# EAGLE board star (EAGLE 9.6.2), part 1 of 2
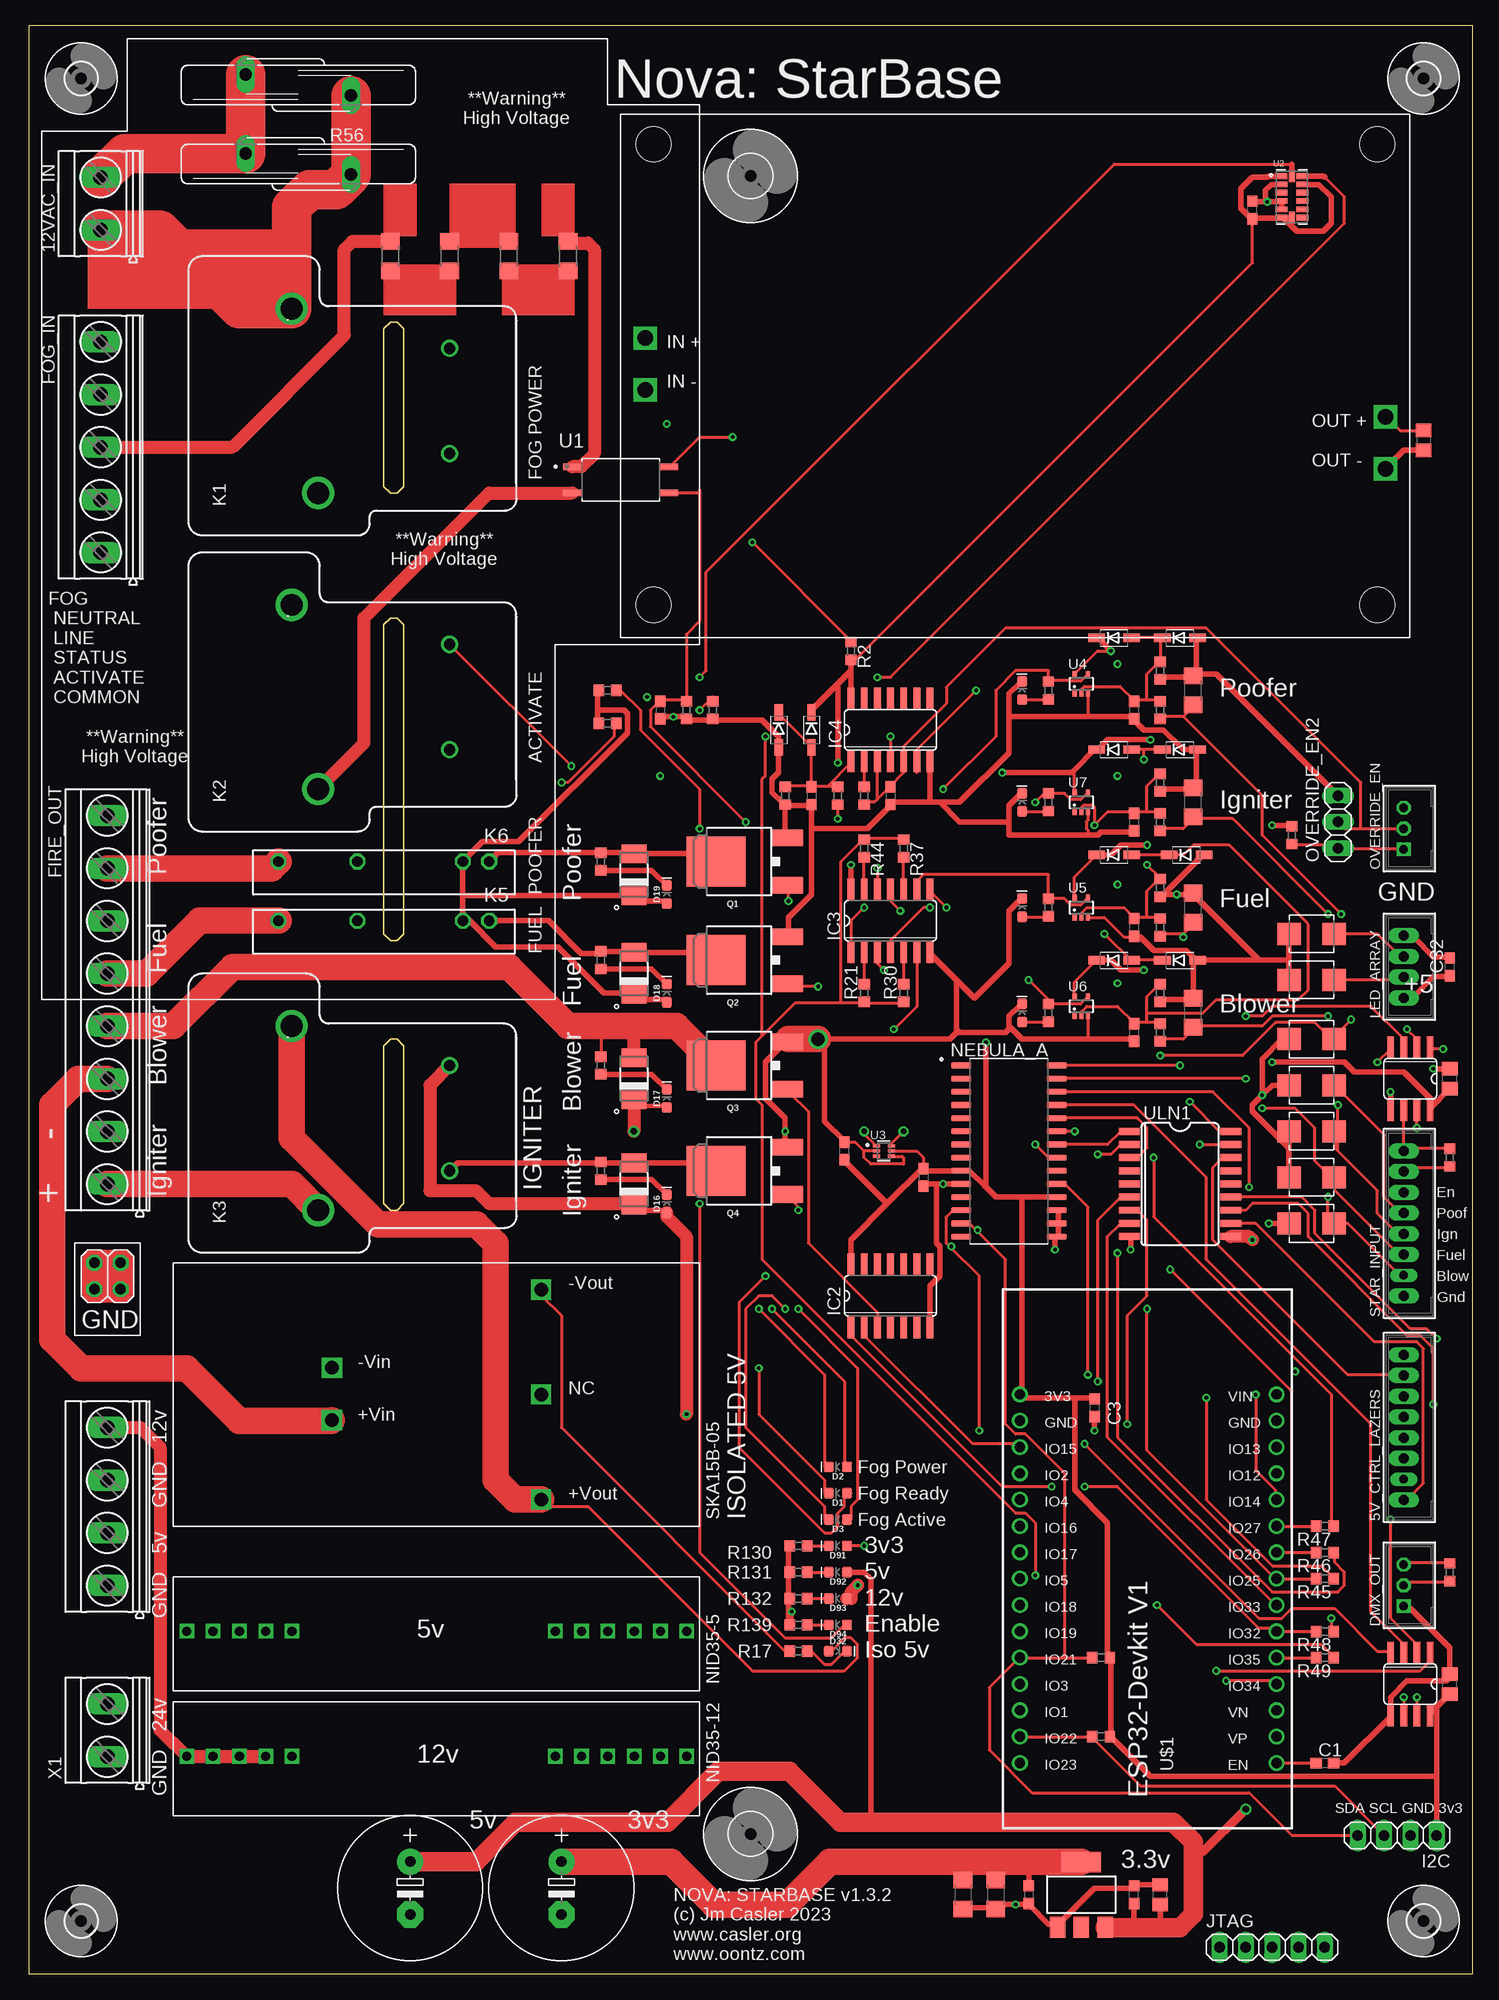
[diagram p0: board, top side]
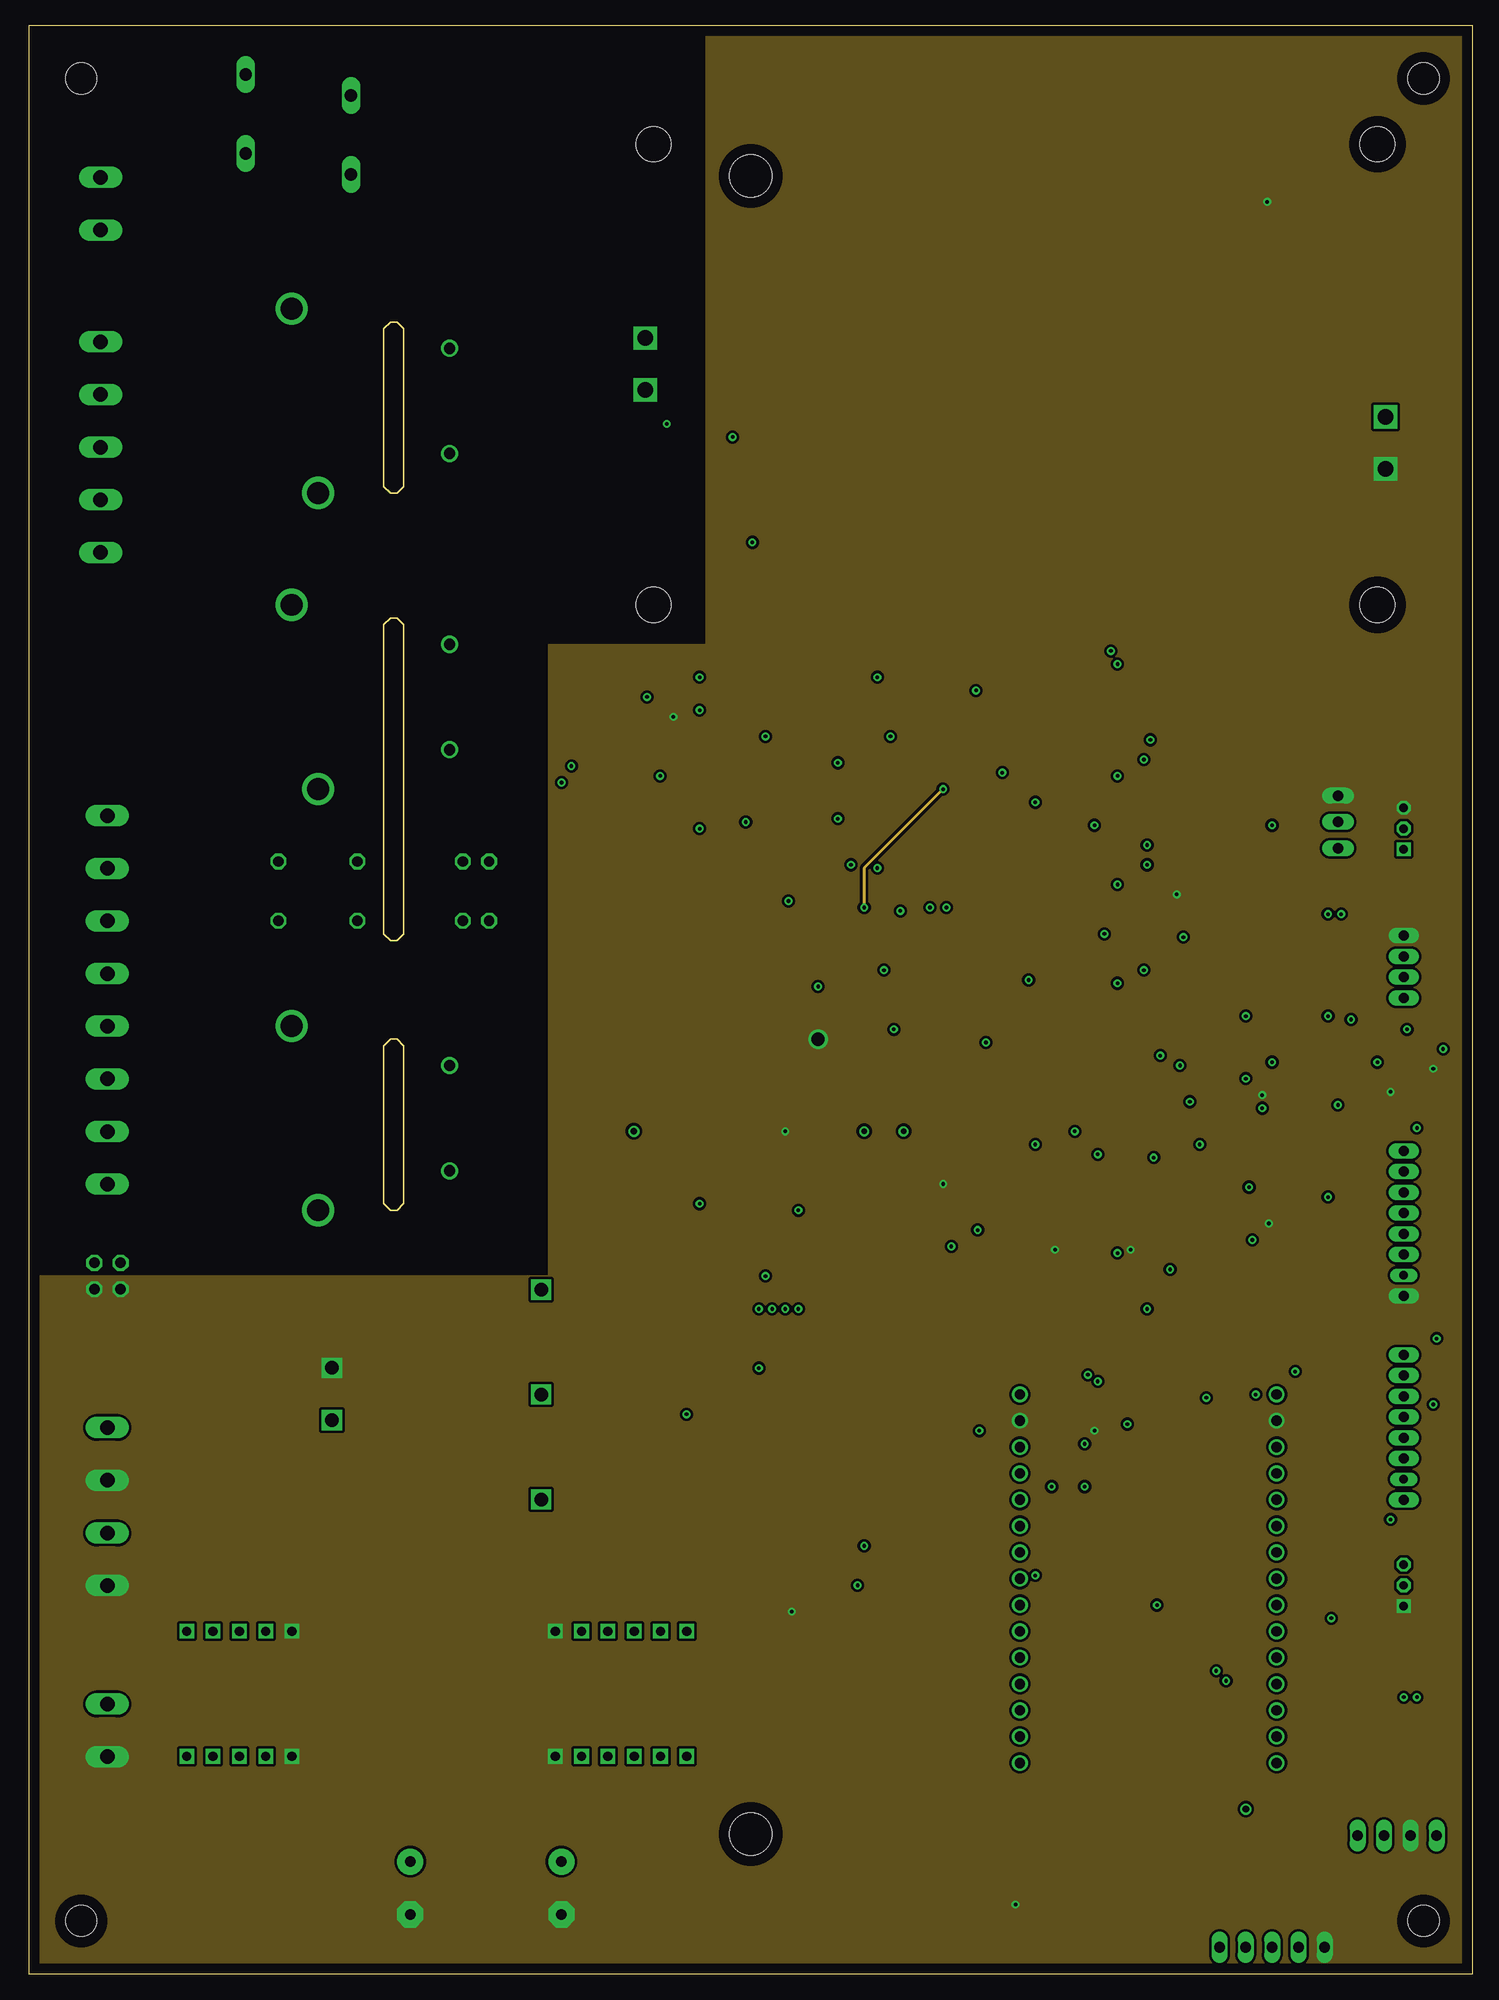
[diagram p1: board, inner layer $GND]
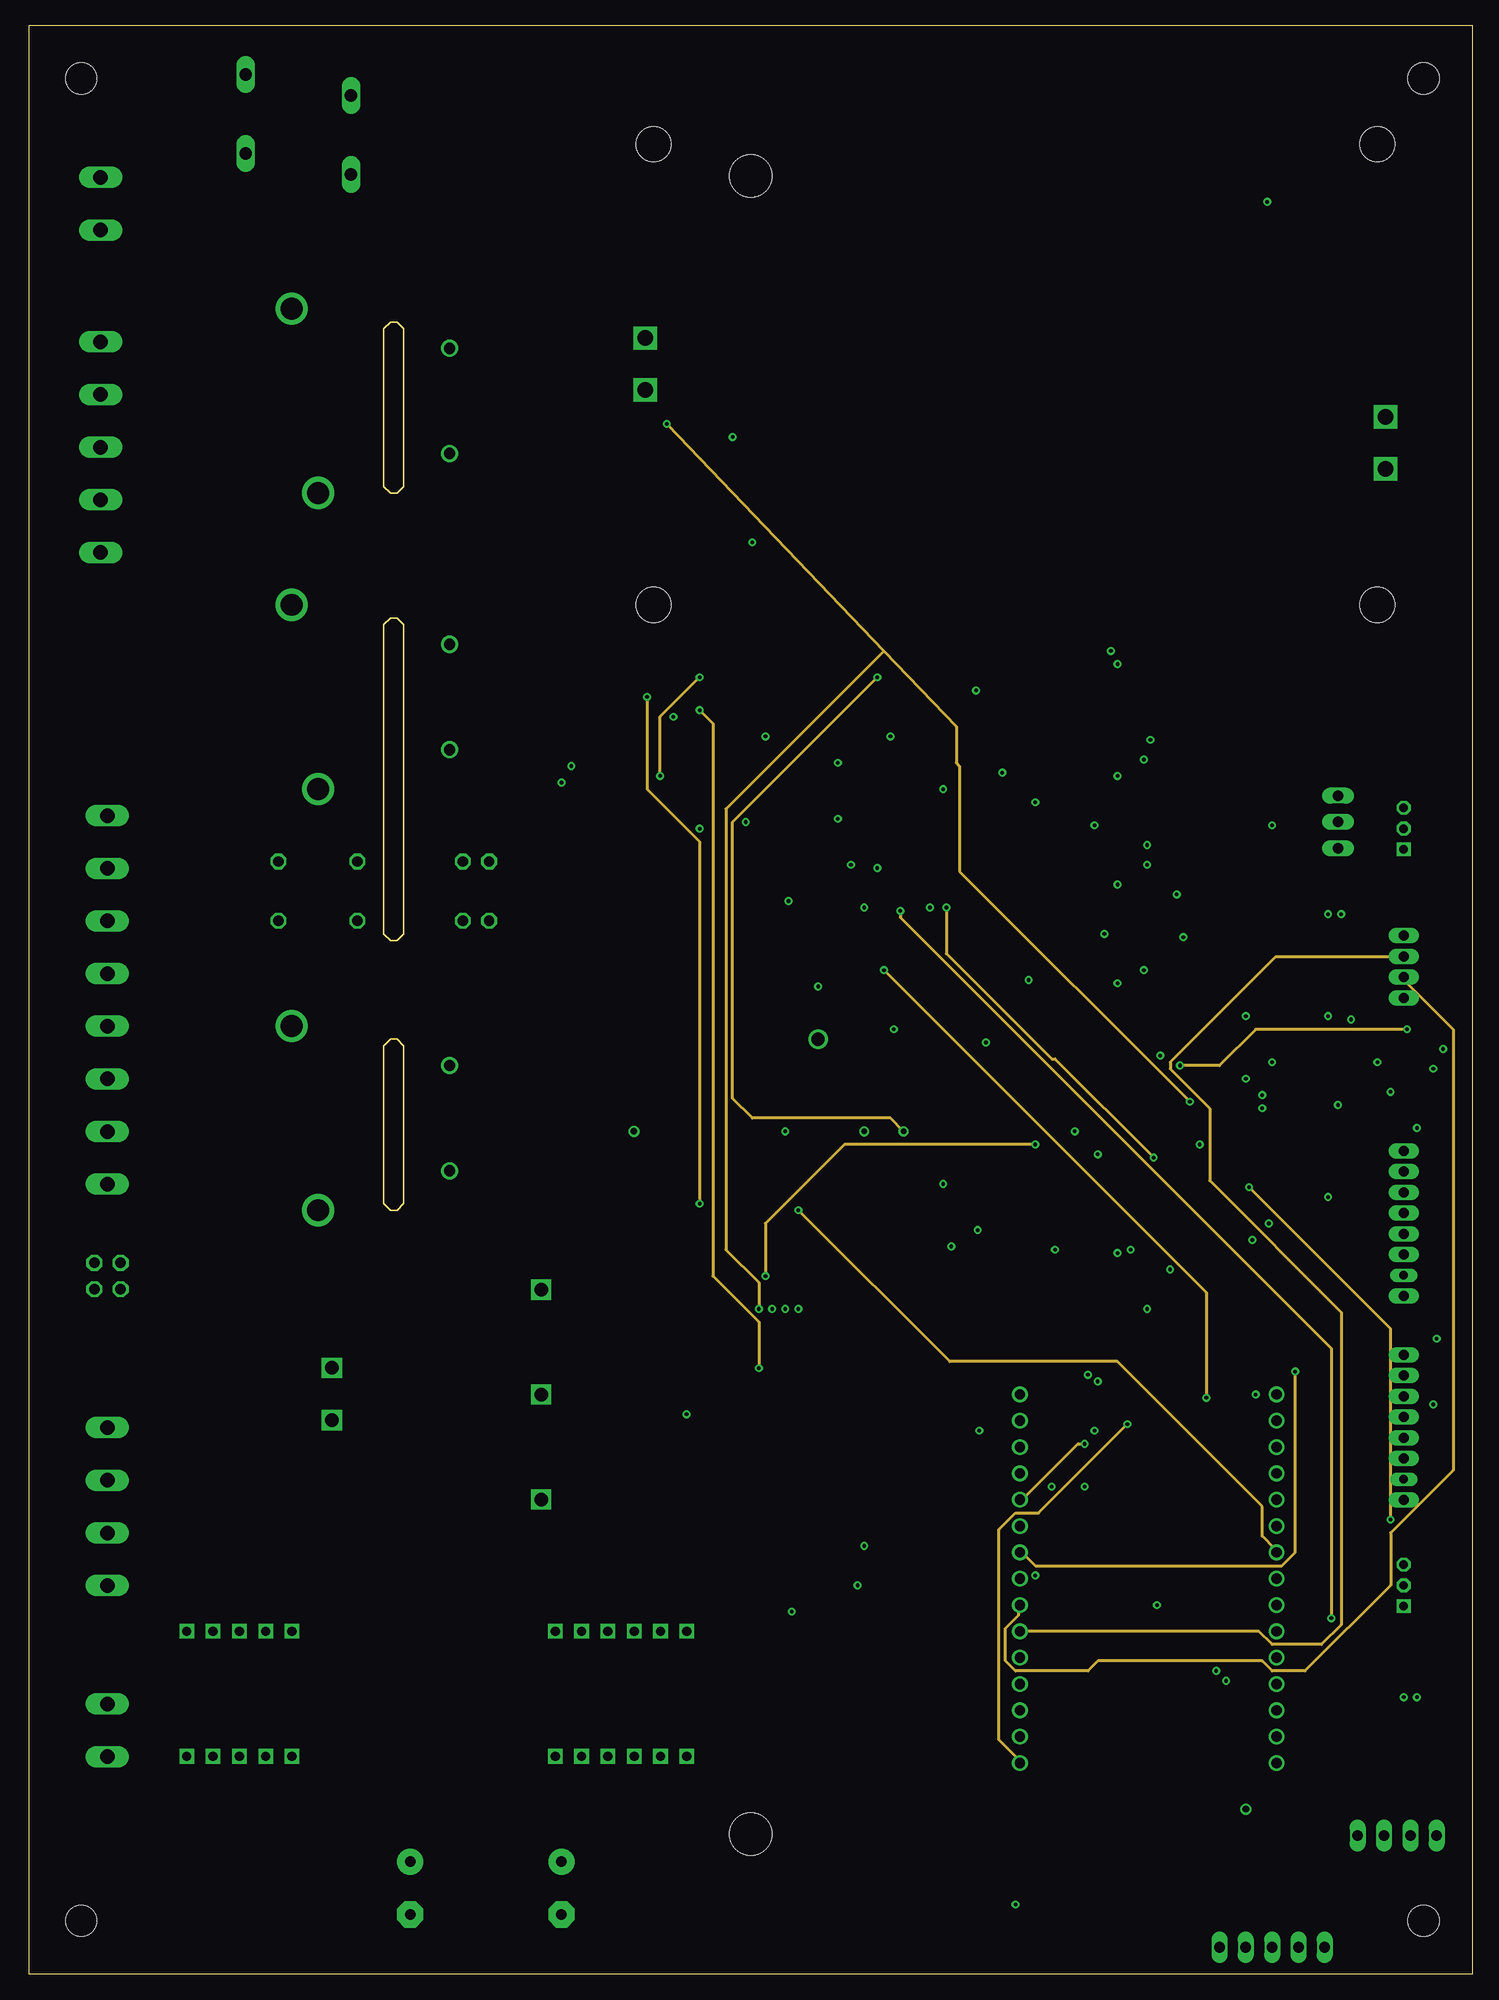
[diagram p2: board, inner layer SIGNAL3]
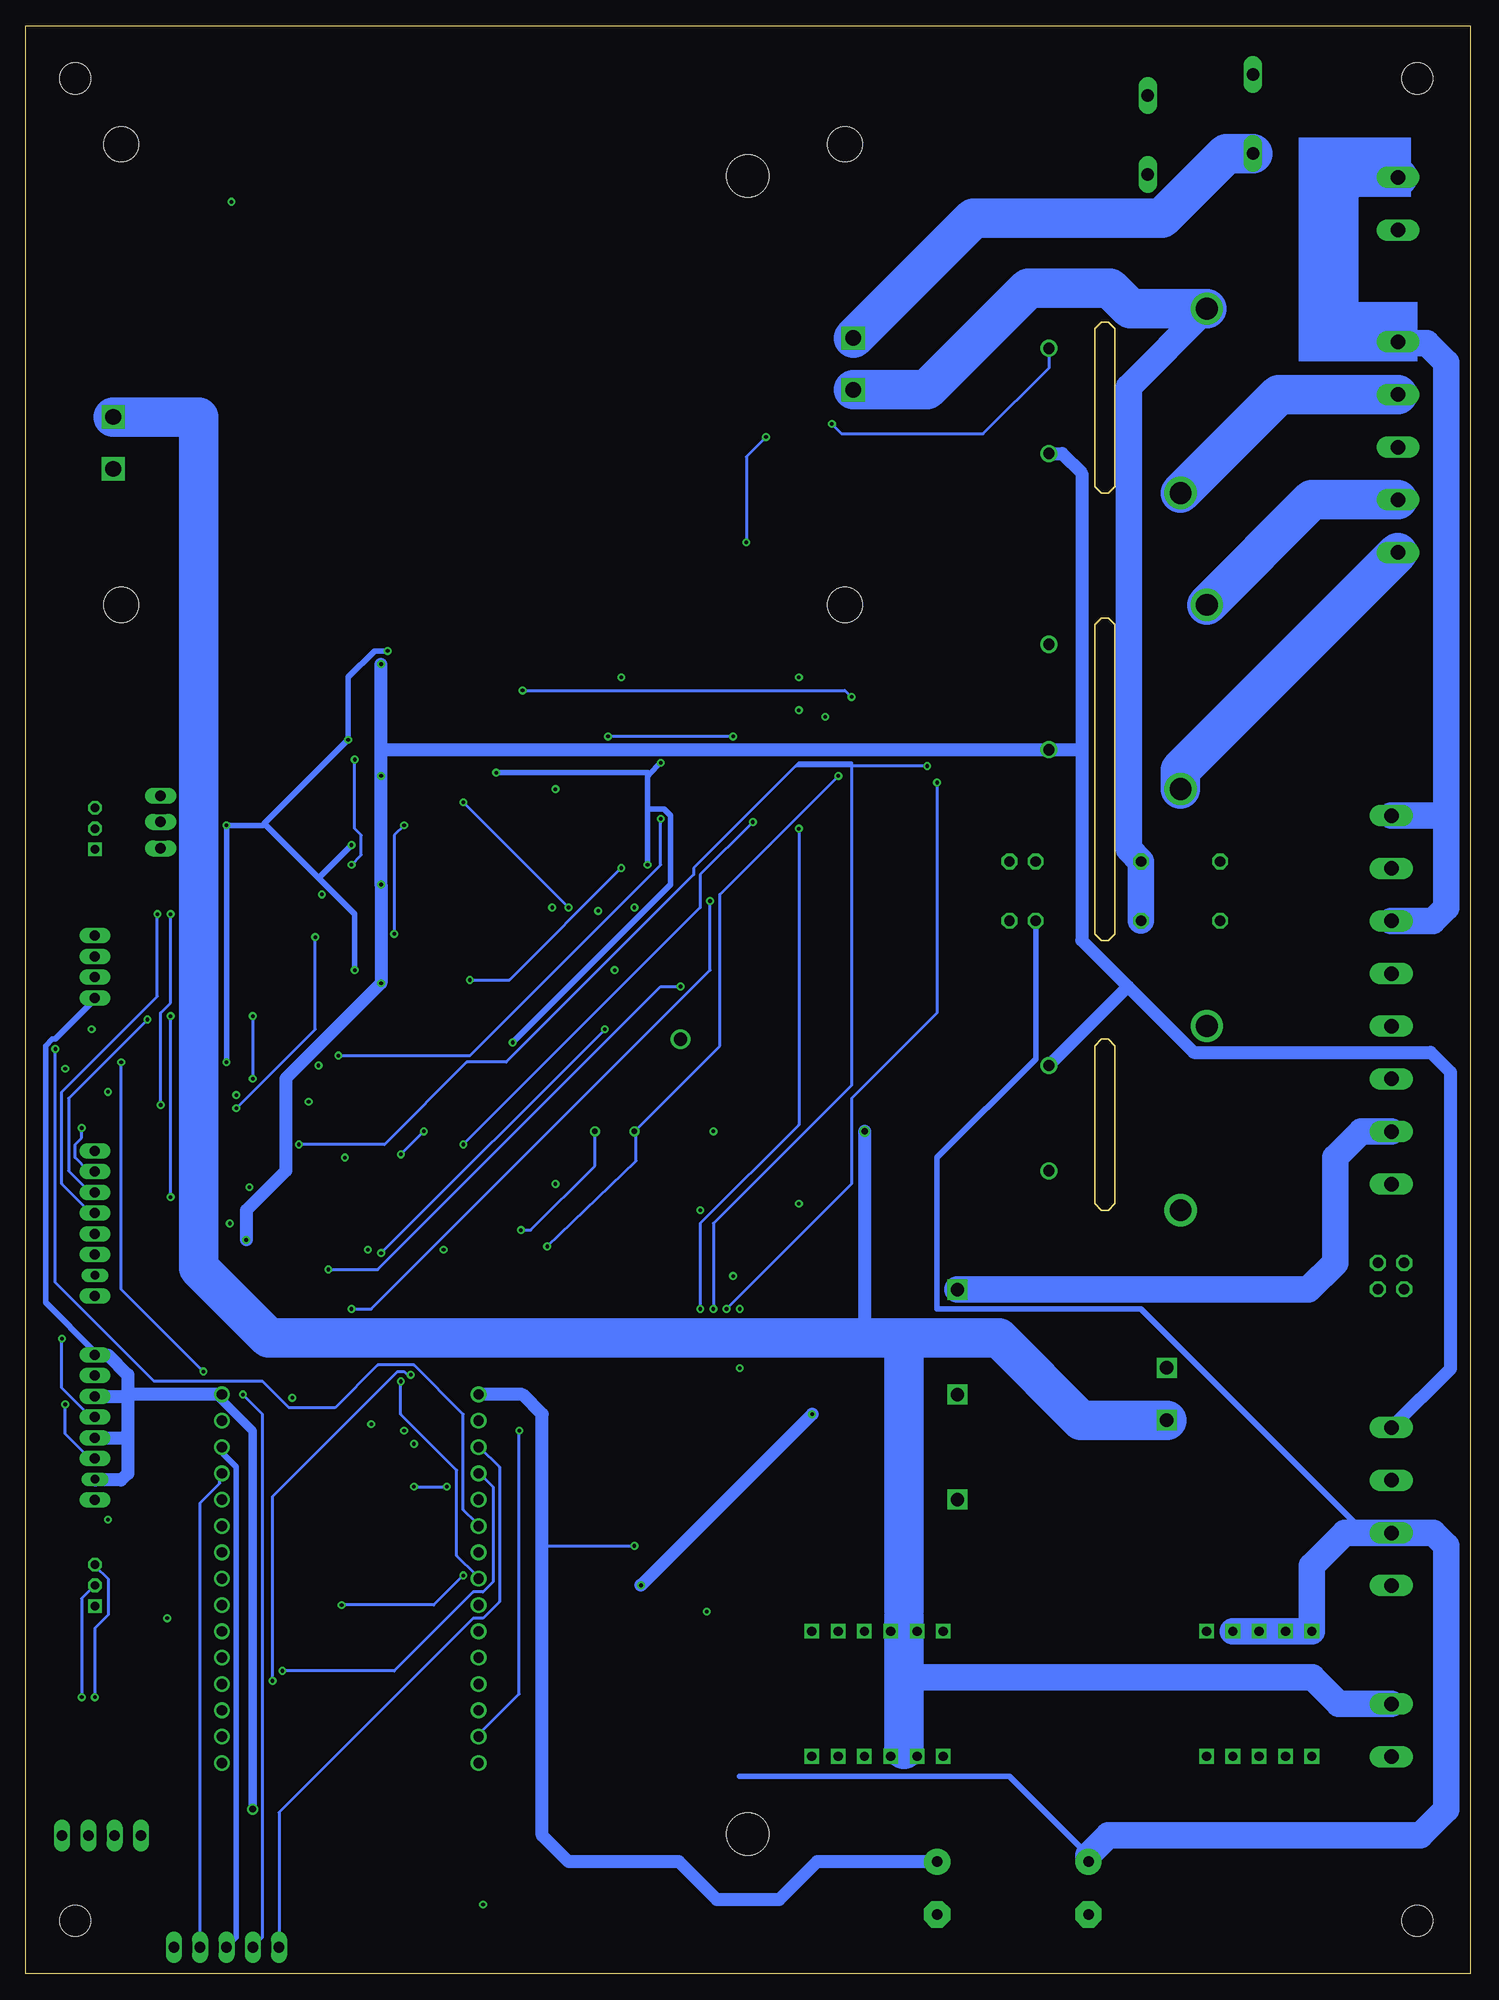
[diagram p3: board, bottom side, seen from below]

Size 139.37 x 187.95 mm. Coordinates in mm from the lower left corner, seen from the top.
Outline: 0,0 139.37,0 139.37,187.95 0,187.95 0,0
Copper layers (1+2*15+16): Top 0.035mm / dielectric 1.5mm / $GND 0.035mm / dielectric 0.15mm / SIGNAL3 0.035mm / dielectric 0.2mm / Bottom 0.035mm
Design rules "default *": minimum track width 6mil, minimum drill 0.35mm, track to track 6mil, track to pad 6mil, pad to pad 6mil, via to via 6mil, smd to smd 5mil, copper to edge 40mil, drill to drill 6mil, minimum pad ring 10mil, minimum via ring 8mil, stop-mask expansion 4mil, vias tented up to drill 20mil, thermal gap 10mil
Net classes: 0 default: width 0.305 mm, clearance 0.203 mm; 1 GND: width 0.305 mm, clearance 0.254 mm; 2 12V: width 1.27 mm, clearance 0.254 mm; 3 5V: width 0.508 mm, clearance 0.254 mm; 4 3V3: width 0.305 mm, clearance 0.254 mm; 5 12V_FUSED: width 0.635 mm, clearance 0.254 mm; 6 120VAC_PWR: width 1.27 mm, clearance 0.508 mm; 7 120VAC: width 1.27 mm, clearance 0.508 mm; 8 60V: width 1.27 mm, clearance 0.508 mm
tRestrict: area 34.3,142.9 to 36.2,159.4; area 34.3,99.7 to 36.2,130.8; area 34.3,73.7 to 36.2,90.2
bRestrict: area 34.3,142.9 to 36.2,159.4; area 34.3,99.7 to 36.2,130.8; area 34.3,73.7 to 36.2,90.2
Milling: 24 lines

## Footprints (pad centres in the part's own frame; a part is rotated, then mirrored left to right if it is on the bottom)
B8B-PH-K = drill 0.965 long: 1 -7,0; 3 -3,0; 4 -1,0; 5 1,0; 6 3,0; 7 5,0; 8 7,0 | drill 0.813 long: 2 -5,0
MKDSN1,5/2-5,08 = drill 1.397 pad 2 long: 1 -2.561,0.025; 2 2.519,0.025
C0603 = smd 1.1 x 1: 1 -0.85,0; 2 0.85,0
C0805 = smd 1.3 x 1.5: 1 -0.95,0; 2 0.95,0
C1206 = smd 1.6 x 1.8: 1 -1.4,0; 2 1.4,0
E5-13 = drill 1.016 pad 2.54: + -2.54,0 | drill 1.016 pad 2.54 octagon: - 2.54,0
LED-0603 = smd 1 x 1: A -0.877,0; C 0.877,0
DIOM4336X265N = smd 2.28 x 2.12: 1 -2.165,0; 2 2.165,0
DO-214AC = smd 1.8 x 2.4: A 2.025,0; C -2.025,0
SOD123 = smd 1.6 x 0.8: A 1.7,0; C -1.7,0
B3B-PH-K = drill 0.813 square: 1 -2,0 | drill 0.813 octagon: 2 0,0; 3 2,0
EPS-25 = drill 1.5 square: IN+ 2.365,28.92; IN- 2.365,23.92; OUT+ 73.795,21.3; OUT- 73.795,16.3 | hole 3.4: 3.175,47.625; 73.025,47.625; 73.025,3.175; 3.175,3.175
MKDSN1,5/8-5,08 = drill 1.397 pad 2 long: 1 -17.801,0.025; 2 -12.721,0.025; 3 -7.641,0.025; 4 -2.561,0.025; 5 2.519,0.025; 6 7.599,0.025; 7 12.679,0.025; 8 17.759,0.025
MKDSN1,5/5-5,08 = drill 1.397 pad 2 long: 1 -10.181,0.025; 2 -5.101,0.025; 3 -0.021,0.025; 4 5.059,0.025; 5 10.139,0.025
3,0 = hole 3: 0,0
4,1 = hole 4.1: 0,0
1X04 = drill 1.016 long: 1 -3.81,0; 2 -1.27,0; 3 1.27,0; 4 3.81,0
SO08 = smd 0.66 x 2.032: 1 -1.905,-3.073; 2 -0.635,-3.073; 3 0.635,-3.073; 4 1.905,-3.073; 5 1.905,3.073; 6 0.635,3.073; 7 -0.635,3.073; 8 -1.905,3.073
SO14 = smd 0.66 x 2.032: 1 -3.81,-3.073; 2 -2.54,-3.073; 3 -1.27,-3.073; 4 0,-3.073; 5 1.27,-3.073; 6 2.54,-3.073; 7 3.81,-3.073; 8 3.81,3.073; 9 2.54,3.073; 10 1.27,3.073; 11 0,3.073; 12 -1.27,3.073; 13 -2.54,3.073; 14 -3.81,3.073
SOT223 = smd 1.5 x 2: 1 -2.3,-3.15; 2 0,-3.15; 3 2.3,-3.15 | smd 3.8 x 2: 4 0,3.15
2X02 = drill 1.016 octagon: 1 -1.27,-1.27; 2 -1.27,1.27; 3 1.27,-1.27; 4 1.27,1.27
1X05 = drill 1.016 long: 1 -5.08,0; 2 -2.54,0; 3 0,0; 4 2.54,0; 5 5.08,0
JT1A-PCB = drill 1.1: 1 5.08,0; 2 -5.08,0 | drill 2.1: C -8.89,12.7; NO 8.89,15.24
AQG = drill 1 octagon: + -7.62,0; - -10.16,0; O1 2.54,0; O2 10.16,0
B4B-PH-K = drill 0.965 long: 1 -3,0; 2 -1,0; 3 1,0; 4 3,0
SOIC127P1030X265-28N = smd 1.9 x 0.6: 1 -4.605,8.255; 2 -4.605,6.985; 3 -4.605,5.715; 4 -4.605,4.445; 5 -4.605,3.175; 6 -4.605,1.905; 7 -4.605,0.635; 8 -4.605,-0.635; 9 -4.605,-1.905; 10 -4.605,-3.175; 11 -4.605,-4.445; 12 -4.605,-5.715; 13 -4.605,-6.985; 14 -4.605,-8.255; 15 4.605,-8.255; 16 4.605,-6.985; 17 4.605,-5.715; 18 4.605,-4.445; 19 4.605,-3.175; 20 4.605,-1.905; 21 4.605,-0.635; 22 4.605,0.635; 23 4.605,1.905; 24 4.605,3.175; 25 4.605,4.445; 26 4.605,5.715; 27 4.605,6.985; 28 4.605,8.255
NID35 = drill 0.9 square: COM1 11.46,5.73; COM2 36.86,5.73; NC 44.48,5.73; RC 49.56,5.73; TRIM 47.02,5.73; VIN1 39.4,5.73; VIN2 41.94,5.73; VOUT1 1.3,5.73; VOUT2 3.84,5.73; VOUT3 6.38,5.73; VOUT4 8.92,5.73
1X03 = drill 1.016 long: 1 -2.54,0; 2 0,0; 3 2.54,0
MKDSN1,5/4-5,08 = drill 1.397 pad 2 long: 1 -7.641,0.025; 2 -2.561,0.025; 3 2.519,0.025; 4 7.599,0.025
DPAK = smd 1.6 x 3: 1 -2.28,-5.31; 3 2.28,-5.31 | smd 4.826 x 5.715: 4 0,1.588
R0603 = smd 1 x 1.1: 1 -0.85,0; 2 0.85,0
R1206 = smd 1.6 x 1.803: 1 -1.422,0; 2 1.422,0
S20K20 = drill 1.194 long: 1 -1.016,-5.08; 2 1.016,5.08
SKA15B = drill 1.3 square: +VIN 15.3,10.22; +VOUT 35.5,2.58; -VIN 15.3,15.28; -VOUT 35.5,22.82; NC 35.5,12.7
SOP254P1015X230-4N = smd 1.84 x 0.64: 1 -4.685,1.27; 2 -4.685,-1.27; 3 4.685,-1.27; 4 4.685,1.27
PQFN80P300X500X100-14N = smd 1.145 x 0.55: 1 -1.01,2; 2 -1.01,1.2; 3 -1.01,0.4; 4 -1.01,-0.4; 5 -1.01,-1.2; 6 -1.01,-2; 8 1.01,-2; 9 1.01,-1.2; 10 1.01,-0.4; 11 1.01,0.4; 12 1.01,1.2; 13 1.01,2 | smd 0.55 x 1.145: 7 0,-2.01; 14 0,2.01
SOT50P160X60-6N = smd 0.67 x 0.3: 1 -0.735,0.5; 2 -0.735,0; 3 -0.735,-0.5; 4 0.735,-0.5; 5 0.735,0; 6 0.735,0.5
SC70-5 = smd 0.4 x 0.6: 1 -0.65,-0.95; 2 0,-0.95; 3 0.65,-0.95; 4 0.65,0.95; 5 -0.65,0.95
ESP32-DEVKITV1 = drill 1 pad 1.422: 1 -22.87,-13.54; 2 -20.33,-13.54; 3 -17.79,-13.54; 4 -15.25,-13.54; 5 -12.71,-13.54; 6 -10.17,-13.54; 7 -7.63,-13.54; 8 -5.09,-13.54; 9 -2.55,-13.54; 10 -0.01,-13.54; 11 2.53,-13.54; 12 5.07,-13.54; 13 7.61,-13.54; 14 10.15,-13.54; 15 12.69,-13.54; 16 12.69,11.23; 17 10.15,11.23; 18 7.61,11.23; 19 5.07,11.23; 20 2.53,11.23; 21 -0.01,11.23; 22 -2.55,11.23; 23 -5.09,11.23; 24 -7.63,11.23; 25 -10.17,11.23; 26 -12.71,11.23; 27 -15.25,11.23; 28 -17.79,11.23; 29 -20.33,11.23; 30 -22.87,11.23
SO18L = smd 0.66 x 2.032: 1 -0.635,-4.902; 2 0.635,-4.902; 3 1.905,-4.902; 4 3.175,-4.902; 5 4.445,-4.902; 6 5.715,-4.902; 7 6.985,-4.902; 8 8.255,-4.902; 9 9.525,-4.902; 10 9.525,4.902; 11 8.255,4.902; 12 6.985,4.902; 13 5.715,4.902; 14 4.445,4.902; 15 3.175,4.902; 16 1.905,4.902; 17 0.635,4.902; 18 -0.635,4.902

## Placement (x,y rotation side)
5V_CTRL_LAZERS  B8B-PH-K  [B8B-PH-K]  132.72,52.7 90 top
12VAC_IN  MKDSN1,5/2-5,08  [MKDSN1,5/2-5,08]  6.99,170.81 90 top
C1  10uf  [C0603]  125.09,20.32 0 top
C2  C_1UF/50V_0603  [C0603]  118.11,170.18 90 top
C3  10uf  [C0603]  102.87,54.61 270 top
C4  C_1UF/50V_0603  [C0603]  78.74,79.38 90 top
C6  1uf  [C0805]  109.22,7.62 90 top
C7  C_1NF/50V_0603  [C0603]  60.96,121.92 270 top
C8  10uf  [C0603]  86.36,76.83 270 top
C11  C_100UF/6.3V_1206  [C1206]  93.34,7.62 270 top
C12  C_100UF/6.3V_1206  [C1206]  90.17,7.62 270 top
C13  C_1NF/2KV_1206  [C1206]  112.39,123.83 90 top
C14  1uf  [C0805]  137.16,86.36 90 top
C15  C_100PF/50V_0603  [C0603]  106.68,121.92 270 top
C16  C_1NF/50V_0603  [C0603]  75.56,113.67 270 top
C17  C_1NF/50V_0603  [C0603]  83.19,113.67 270 top
C18  C_1NF/2KV_1206  [C1206]  112.39,113.03 90 top
C19  C_100PF/50V_0603  [C0603]  106.68,111.12 270 top
C20  C_1NF/2KV_1206  [C1206]  112.39,102.87 90 top
C21  C_100PF/50V_0603  [C0603]  106.68,100.97 270 top
C22  C_1NF/2KV_1206  [C1206]  112.39,92.71 90 top
C23  C_100PF/50V_0603  [C0603]  106.68,90.81 270 top
C25  1uf  [C0805]  134.62,147.96 270 top
C28  2200uf  [E5-13]  51.44,8.26 270 top
C32  C_1UF/50V_0603  [C0603]  137.16,97.16 90 top
C33  1uf  [C0805]  137.16,27.94 90 top
C35  10uf  [C0603]  106.68,7.62 90 top
C36  10uf  [C0603]  96.52,7.62 270 top
C89  2200uf  [E5-13]  36.83,8.26 270 top
D1  red  [LED-0603]  78.11,46.35 180 top
D2  blue  [LED-0603]  78.11,48.9 180 top
D3  blue  [LED-0603]  78.11,43.81 180 top
D4  SMBJ8.0CA  [DIOM4336X265N]  123.83,100.33 0 top
D5  SMBJ8.0CA  [DIOM4336X265N]  123.83,76.83 0 top
D6  green  [LED-0603]  95.89,123.83 90 top
D7  green  [LED-0603]  95.89,113.03 90 top
D8  green  [LED-0603]  95.89,102.87 90 top
D9  green  [LED-0603]  95.89,92.71 90 top
D10  SMBJ8.0CA  [DIOM4336X265N]  123.83,72.39 0 top
D11  SMBJ8.0CA  [DIOM4336X265N]  123.83,81.28 0 top
D12  D_SS210_MDD_SMA  [DO-214AC]  58.42,106.05 90 top
D13  D_SS210_MDD_SMA  [DO-214AC]  58.42,96.52 90 top
D14  D_SS210_MDD_SMA  [DO-214AC]  58.42,86.36 90 top
D15  D_SS210_MDD_SMA  [DO-214AC]  58.42,76.2 90 top
D16  blue  [LED-0603]  61.59,74.3 90 top
D17  blue  [LED-0603]  61.59,84.45 90 top
D18  blue  [LED-0603]  61.59,94.61 90 top
D19  blue  [LED-0603]  61.59,104.14 90 top
D20  SMBJ8.0CA  [DIOM4336X265N]  123.83,90.17 0 top
D21  SMBJ8.0CA  [DIOM4336X265N]  123.83,95.89 0 top
D22  D_B5819W-SL_CHANGJ_SOD123  [SOD123]  104.78,128.91 0 top
D23  D_B5819W-SL_CHANGJ_SOD123  [SOD123]  111.12,128.91 0 top
D24  D_B5819W-SL_CHANGJ_SOD123  [SOD123]  104.78,118.11 0 top
D25  D_B5819W-SL_CHANGJ_SOD123  [SOD123]  111.12,118.11 0 top
D26  D_B5819W-SL_CHANGJ_SOD123  [SOD123]  104.78,107.95 0 top
D27  D_B5819W-SL_CHANGJ_SOD123  [SOD123]  111.76,107.95 0 top
D28  D_B5819W-SL_CHANGJ_SOD123  [SOD123]  104.78,97.79 0 top
D29  D_B5819W-SL_CHANGJ_SOD123  [SOD123]  111.12,97.79 0 top
D30  D_B5819W-SL_CHANGJ_SOD123  [SOD123]  75.56,120.02 270 top
D31  D_B5819W-SL_CHANGJ_SOD123  [SOD123]  72.39,120.02 270 top
D32  blue  [LED-0603]  78.11,31.11 0 top
D91  red  [LED-0603]  78.11,41.27 180 top
D92  green  [LED-0603]  78.11,38.73 180 top
D93  blue  [LED-0603]  78.11,36.2 180 top
D94  yellow  [LED-0603]  78.11,33.66 180 top
D139  SMBJ8.0CA  [DIOM4336X265N]  123.83,85.72 0 top
DMX_OUT  B3B-PH-K  [B3B-PH-K]  132.72,37.47 90 top
EPP-120S-24  EPP-120S  [EPS-25]  57.15,128.91 0 top
FIRE_OUT  MKDSN1,5/8-5,08  [MKDSN1,5/8-5,08]  7.62,93.98 90 top
FOG_IN  MKDSN1,5/5-5,08  [MKDSN1,5/5-5,08]  6.99,147.32 90 top
H1  MOUNT-HOLE3.0  [3,0]  134.62,5.08 0 top
H2  MOUNT-HOLE3.0  [3,0]  134.62,182.88 0 top
H3  MOUNT-HOLE3.0  [3,0]  5.08,182.88 0 top
H4  MOUNT-HOLE3.0  [3,0]  5.08,5.08 0 top
H5  MOUNT-HOLE4.1  [4,1]  69.69,173.47 0 top
H6  MOUNT-HOLE4.1  [4,1]  69.69,13.47 0 top
I2C  [1X04]  132.08,13.34 180 top
IC1  MAX481CSA  [SO08]  133.35,86.36 180 top
IC2  74HCT08D  [SO14]  83.19,65.41 0 top
IC3  74HCT08D  [SO14]  83.19,101.6 0 top
IC4  7404D  [SO14]  83.19,120.02 0 top
IC8  MAX481CSA  [SO08]  133.35,27.94 180 top
IC22  LD117AS12TR  [SOT223]  101.6,7.62 0 top
JP1  [2X02]  7.62,67.31 0 top
JTAG  [1X05]  120.02,2.54 180 top
K1  T90-12VDC-TL-A  [JT1A-PCB]  40.64,151.76 90 top
K2  T90-12VDC-TL-A  [JT1A-PCB]  40.64,123.19 90 top
K3  T90-12VDC-TL-A  [JT1A-PCB]  40.64,82.55 90 top
K5  AQG22110  [AQG]  34.29,101.6 180 top
K6  AQG22110  [AQG]  34.29,107.31 180 top
LED_ARRAY  B4B-PH-K  [B4B-PH-K]  132.72,97.16 90 top
NEBULA_A  MCP23017-E/SO  [SOIC127P1030X265-28N]  94.61,79.38 0 top
NID35-5  NID35  [NID35]  13.97,27.3 0 top
NID35-12  NID35  [NID35]  13.97,15.24 0 top
OVERRIDE_EN  B3B-PH-K  [B3B-PH-K]  132.72,110.49 90 top
OVERRIDE_EN2  [1X03]  126.36,111.12 90 top
POWER_IN  MKDSN1,5/4-5,08  [MKDSN1,5/4-5,08]  7.62,45.09 90 top
Q1  35A/25V/8.5mΩ  [DPAK]  67.94,107.31 90 top
Q2  35A/25V/8.5mΩ  [DPAK]  67.94,97.79 90 top
Q3  35A/25V/8.5mΩ  [DPAK]  67.94,87.63 90 top
Q4  35A/25V/8.5mΩ  [DPAK]  67.94,77.47 90 top
R1  120  [R0603]  137.16,78.74 270 top
R2  R_150R_0603  [R0603]  79.38,127.64 270 top
R3  R_1.2K_0603  [R0603]  55.88,123.83 180 top
R4  R_1.2K_0603  [R0603]  55.88,120.65 180 top
R5  120  [R0603]  137.16,38.73 270 top
R6  R_100K_0603  [R0603]  73.03,113.67 90 top
R7  1k  [R0603]  66.04,121.92 270 top
R8  1k  [R0603]  63.5,121.92 270 top
R9  R_330R_0603  [R0603]  109.22,121.92 90 top
R10  R_4.7K_1206  [R1206]  52.07,165.74 90 top
R11  R_4.7K_1206  [R1206]  46.35,165.74 270 top
R12  R_4.7K_1206  [R1206]  40.64,165.74 90 top
R13  R_4.7K_1206  [R1206]  34.92,165.74 270 top
R14  R_10K_0603  [R0603]  109.22,125.73 90 top
R15  R_2K_0603  [R0603]  55.24,77.47 90 top
R16  R_1K_0603  [R0603]  98.42,123.83 90 top
R17  R_1K_0603  [R0603]  74.3,31.11 0 top
R19  R_5.1K_0603  [R0603]  78.11,113.67 90 top
R20  R_5.1K_0603  [R0603]  80.64,113.67 270 top
R21  R_2K_0603  [R0603]  80.64,94.61 90 top
R22  R_330R_0603  [R0603]  109.22,111.12 90 top
R23  R_10K_0603  [R0603]  109.22,114.94 90 top
R25  R_1K_0603  [R0603]  98.42,113.03 90 top
R26  R_3K_0603  [R0603]  103.5,22.86 0 top
R27  R_3K_0603  [R0603]  103.5,30.48 0 top
R30  R_2K_0603  [R0603]  84.45,94.61 90 top
R31  R_330R_0603  [R0603]  109.22,100.97 90 top
R32  R_10K_0603  [R0603]  109.22,104.78 90 top
R34  R_1K_0603  [R0603]  98.42,102.87 90 top
R37  R_2K_0603  [R0603]  84.45,108.58 270 top
R38  R_330R_0603  [R0603]  109.22,90.81 90 top
R39  R_10K_0603  [R0603]  109.22,94.61 90 top
R41  R_1K_0603  [R0603]  98.42,92.71 90 top
R44  R_2K_0603  [R0603]  80.64,108.58 270 top
R45  R_6.2K_0603  [R0603]  125.09,38.1 180 top
R46  R_6.2K_0603  [R0603]  125.09,40.64 180 top
R47  R_6.2K_0603  [R0603]  125.09,43.18 180 top
R48  R_6.2K_0603  [R0603]  125.09,33.02 180 top
R49  R_0R_0603  [R0603]  125.09,30.48 180 top
R50  R_1K_0603  [R0603]  121.92,109.86 270 top
R55  S20K20  [S20K20]  26.04,174.62 90 top
R56  S20K20  [S20K20]  26.04,182.25 90 top
R60  R_1K_0603  [R0603]  55.24,107.31 90 top
R61  R_1K_0603  [R0603]  55.24,97.79 90 top
R62  R_15K_0603  [R0603]  55.24,87.63 90 top
R130  1k  [R0603]  74.3,41.27 180 top
R131  2.2k  [R0603]  74.3,38.73 180 top
R132  1k  [R0603]  74.3,36.2 180 top
R139  1k  [R0603]  74.3,33.66 180 top
SKA15B-05  SKA15B  [SKA15B]  13.97,43.18 0 top
STAR_INPUT  B8B-PH-K  [B8B-PH-K]  132.72,72.39 90 top
U1  TCLT1600  [SOP254P1015X230-4N]  57.15,144.15 0 top
U2  ADXL343BCCZ-RL7  [PQFN80P300X500X100-14N]  121.92,171.45 0 top
U3  TMP102AIDRLR  [SOT50P160X60-6N]  82.55,79.38 0 top
U4  SN74LVC1G17DCK  [SC70-5]  101.6,124.46 0 top
U5  SN74LVC1G17DCK  [SC70-5]  101.6,102.87 0 top
U6  SN74LVC1G17DCK  [SC70-5]  101.6,93.34 0 top
U7  SN74LVC1G17DCK  [SC70-5]  101.6,113.03 0 top
U$1  ESP32DEVKITV1  [ESP32-DEVKITV1]  109.22,33.02 270 top
ULN1  [SO18L]  111.12,80.64 270 top
X1  MKDSN1,5/2-5,08  [MKDSN1,5/2-5,08]  7.62,23.5 90 top

## Library data of the parts
5V_CTRL_LAZERS STAR_INPUT = con-jst-ph; LCSC_PART: C157974
12VAC_IN FIRE_OUT FOG_IN POWER_IN X1 = con-phoenix-508-jm
C1 C3 C8 C35 C36 = rcl; LCSC_PART: C19702; SPICEPREFIX: C
C2 C4 C32 = JLC PCB Basic Parts_loc; LCSC_DATASHEET: https://datasheet.lcsc.com/lcsc/1810261812_Samsung-Electro-Mechanics-CL10A105KB8NNNC_C15849.pdf; LCSC_PART: C15849; LCSC_ROTATION_CCW: 0; LCSC_STOCK: 14650365; PROPERTIES: 50V 1uF X5R ±10% 0603 ROHS
C6 C14 C25 C33 = rcl; LCSC_PART: C15849; SPICEPREFIX: C
C7 C16 C17 = JLC PCB Basic Parts_loc; LCSC_DATASHEET: https://datasheet.lcsc.com/lcsc/1811071810_Samsung-Electro-Mechanics-CL10B102KB8NNNC_C1588.pdf; LCSC_PART: C1588; LCSC_ROTATION_CCW: 0; LCSC_STOCK: 2243141; PROPERTIES: 50V 1nF X7R ±10% 0603 ROHS
C11 C12 = JLC PCB Basic Parts_loc; LCSC_DATASHEET: https://datasheet.lcsc.com/lcsc/1810301816_Samsung-Electro-Mechanics-CL31A107MQHNNNE_C15008.pdf; LCSC_PART: C15008; LCSC_ROTATION_CCW: 0; LCSC_STOCK: 547696; PROPERTIES: 6.3V 100uF X5R ±20% 1206 ROHS
C13 C18 C20 C22 = JLC PCB Basic Parts_loc; LCSC_DATASHEET: https://datasheet.lcsc.com/lcsc/1810311314_FH-Guangdong-Fenghua-Advanced-Tech-1206B102K202NT_C9196.pdf; LCSC_PART: C9196; LCSC_ROTATION_CCW: 0; LCSC_STOCK: 8943689; PROPERTIES: 2kV 1nF X7R ±10% 1206 ROHS
C15 C19 C21 C23 = JLC PCB Basic Parts_loc; LCSC_DATASHEET: https://datasheet.lcsc.com/lcsc/1811151136_Samsung-Electro-Mechanics-CL10C101JB8NNNC_C14858.pdf; LCSC_PART: C14858; LCSC_ROTATION_CCW: 0; LCSC_STOCK: 2152181; PROPERTIES: 50V 100pF C0G ±5% 0603 ROHS
C28 C89 = rcl; DIST: https://amzn.to/3iR84VS; SPICEPREFIX: C
D1 D91 = SparkFun-LED; JLC_ROTATION: 180; LCSC_PART: C2286
D2 D3 D16-D19 D32 D93 = SparkFun-LED; JLC_ROTATION: 180; LCSC_PART: C72041
D4 D5 D10 D11 D20 D21 D139 = SMBJ8.0CA; AVAILABILITY: In Stock; DESCRIPTION: 600 Watt TVS 5.0v working, 9v clamp; LCSC_PART: C78757; MF: Littelfuse Inc.; MP: SMBJ8.0CA; PACKAGE: DO-214 Littelfuse Inc.; PRICE: None; PURCHASE-URL: https://pricing.snapeda.com/search/part/SMBJ8.0CA/?ref=eda
D6-D9 D92 = SparkFun-LED; JLC_ROTATION: 180; LCSC_PART: C72043
D12-D15 = JLC PCB Basic Parts_loc; LCSC_DATASHEET: https://datasheet.lcsc.com/lcsc/1811071613_MDD-Microdiode-Electronics--SS210_C14996.pdf; LCSC_PART: C14996; LCSC_ROTATION_CCW: 180; LCSC_STOCK: 307807; PROPERTIES: 100V 850mV@2A 2A SMA(DO-214AC) Schottky Barrier Diodes (SBD) ROHS
D22-D31 = JLC PCB Basic Parts_loc; LCSC_DATASHEET: https://datasheet.lcsc.com/lcsc/1809140216_Changjiang-Electronics-Tech--CJ-B5819W-SL_C8598.pdf; LCSC_PART: C8598; LCSC_ROTATION_CCW: 180; LCSC_STOCK: 304161; PROPERTIES: 40V 600mV@1A 1A SOD-123 Schottky Barrier Diodes (SBD) ROHS
D94 = SparkFun-LED; JLC_ROTATION: 180; LCSC_PART: C72038
DMX_OUT LED_ARRAY OVERRIDE_EN = con-jst-ph
EPP-120S-24 NID35-5 NID35-12 SKA15B-05 = Nova
H1-H6 = holes
I2C JP1 JTAG OVERRIDE_EN2 = pinhead
IC1 IC8 = maxim; LCSC_PART: C8963; MF: MAXIM; MPN: MAX481CSA; OC_FARNELL: unknown; OC_NEWARK: 90C3817
IC2 IC3 = 74xx-eu; LCSC_PART: C5593
IC4 = 74xx-us; LCSC_PART: C5590
IC22 = v-reg; LCSC_PART: C347222; PRICE: 0.5
K1-K3 K5 K6 = relay; OC_FARNELL: unknown; OC_NEWARK: unknown
NEBULA_A = MCP23017-E_SO; AVAILABILITY: In Stock; DESCRIPTION: I/O Expander 16 I²C 1.7 MHz 28-SOIC; LCSC_PART: C629440; MF: Microchip; MP: MCP23017-E/SO; PACKAGE: SOIC-28 Microchip; PRICE: None; PURCHASE-URL: https://pricing.snapeda.com/search/part/MCP23017-E/SO/?ref=eda
Q1 Q2 Q4 = SparkFun-DiscreteSemi; LCSC_PART: C2995335; PROD_ID: TRANS-09984
Q3 = SparkFun-DiscreteSemi; PROD_ID: TRANS-09984
R1 R5 = rcl; LCSC_PART: C22787; SPICEPREFIX: R
R2 = JLC PCB Basic Parts_loc; LCSC_DATASHEET: https://datasheet.lcsc.com/lcsc/2110252030_UNI-ROYAL-Uniroyal-Elec-0603WAF1500T5E_C22808.pdf; LCSC_PART: C22808; LCSC_ROTATION_CCW: 0; LCSC_STOCK: 466893; PROPERTIES: ±1% 1/10W Thick Film Resistors 75V ±100ppm -55°C~+155°C 150Ohm 0603 ROHS
R3 R4 = JLC PCB Basic Parts_loc; LCSC_DATASHEET: https://datasheet.lcsc.com/lcsc/2110252030_UNI-ROYAL-Uniroyal-Elec-0603WAF1201T5E_C22765.pdf; LCSC_PART: C22765; LCSC_ROTATION_CCW: 0; LCSC_STOCK: 476320; PROPERTIES: ±1% 1/10W Thick Film Resistors 75V ±100ppm -55°C~+155°C 1.2kOhm 0603 ROHS
R6 = JLC PCB Basic Parts_loc; LCSC_DATASHEET: https://datasheet.lcsc.com/lcsc/2110260030_UNI-ROYAL-Uniroyal-Elec-0603WAF1003T5E_C25803.pdf; LCSC_PART: C25803; LCSC_ROTATION_CCW: 0; LCSC_STOCK: 5826279; PROPERTIES: ±1% 1/10W Thick Film Resistors 75V ±100ppm -55°C~+155°C 100kOhm 0603 ROHS
R7 R8 R130 R132 R139 = rcl; LCSC_PART: C21190; SPICEPREFIX: R
R9 R22 R31 R38 = JLC PCB Basic Parts_loc; LCSC_DATASHEET: https://datasheet.lcsc.com/lcsc/2110252130_UNI-ROYAL-Uniroyal-Elec-0603WAF3300T5E_C23138.pdf; LCSC_PART: C23138; LCSC_ROTATION_CCW: 0; LCSC_STOCK: 862746; PROPERTIES: ±1% 1/10W Thick Film Resistors 75V ±100ppm -55°C~+155°C 330Ohm 0603 ROHS
R10-R13 = JLC PCB Basic Parts_loc; LCSC_DATASHEET: https://datasheet.lcsc.com/lcsc/2110251930_UNI-ROYAL-Uniroyal-Elec-1206W4F4701T5E_C17936.pdf; LCSC_PART: C17936; LCSC_ROTATION_CCW: 0; LCSC_STOCK: 161665; PROPERTIES: ±1% 250mW Thick Film Resistors 200V ±100ppm -55°C~+155°C 4.7kOhm 1206 ROHS
R14 R23 R32 R39 = JLC PCB Basic Parts_loc; LCSC_DATASHEET: https://datasheet.lcsc.com/lcsc/2110260030_UNI-ROYAL-Uniroyal-Elec-0603WAF1002T5E_C25804.pdf; LCSC_PART: C25804; LCSC_ROTATION_CCW: 0; LCSC_STOCK: 7979018; PROPERTIES: ±1% 1/10W Thick Film Resistors 75V ±100ppm -55°C~+155°C 10kOhm 0603 ROHS
R15 R21 R30 R37 R44 = JLC PCB Basic Parts_loc; LCSC_DATASHEET: https://datasheet.lcsc.com/lcsc/2110252130_UNI-ROYAL-Uniroyal-Elec-0603WAF2001T5E_C22975.pdf; LCSC_PART: C22975; LCSC_ROTATION_CCW: 0; LCSC_STOCK: 3372290; PROPERTIES: ±1% 1/10W Thick Film Resistors 75V ±100ppm -55°C~+155°C 2kOhm 0603 ROHS
R16 R17 R25 R34 R41 R50 R60 R61 = JLC PCB Basic Parts_loc; LCSC_DATASHEET: https://datasheet.lcsc.com/lcsc/2110252030_UNI-ROYAL-Uniroyal-Elec-0603WAF1001T5E_C21190.pdf; LCSC_PART: C21190; LCSC_ROTATION_CCW: 0; LCSC_STOCK: 5175299; PROPERTIES: ±1% 1/10W Thick Film Resistors 75V ±100ppm -55°C~+155°C 1kOhm 0603 ROHS
R19 R20 = JLC PCB Basic Parts_loc; LCSC_DATASHEET: https://datasheet.lcsc.com/lcsc/2110252130_UNI-ROYAL-Uniroyal-Elec-0603WAF5101T5E_C23186.pdf; LCSC_PART: C23186; LCSC_ROTATION_CCW: 0; LCSC_STOCK: 2912883; PROPERTIES: ±1% 1/10W Thick Film Resistors 75V ±100ppm -55°C~+155°C 5.1kOhm 0603 ROHS
R26 R27 = JLC PCB Basic Parts_loc; LCSC_DATASHEET: https://datasheet.lcsc.com/lcsc/2110251730_UNI-ROYAL-Uniroyal-Elec-0603WAF3001T5E_C4211.pdf; LCSC_PART: C4211; LCSC_ROTATION_CCW: 0; LCSC_STOCK: 740793; PROPERTIES: ±1% 1/10W Thick Film Resistors 75V ±100ppm -55°C~+155°C 3kOhm 0603 ROHS
R45-R48 = JLC PCB Basic Parts_loc; LCSC_DATASHEET: https://datasheet.lcsc.com/lcsc/2110251730_UNI-ROYAL-Uniroyal-Elec-0603WAF6201T5E_C4260.pdf; LCSC_PART: C4260; LCSC_ROTATION_CCW: 0; LCSC_STOCK: 176806; PROPERTIES: ±1% 1/10W Thick Film Resistors 75V ±100ppm -55°C~+155°C 6.2kOhm 0603 ROHS
R49 = JLC PCB Basic Parts_loc; LCSC_DATASHEET: https://datasheet.lcsc.com/lcsc/2110252030_UNI-ROYAL-Uniroyal-Elec-0603WAF0000T5E_C21189.pdf; LCSC_PART: C21189; LCSC_ROTATION_CCW: 0; LCSC_STOCK: 891306; PROPERTIES: ±1% 1/10W Thick Film Resistors 75V -55°C~+155°C 0Ohm 0603 ROHS
R55 R56 = varistor
R62 = JLC PCB Basic Parts_loc; LCSC_DATASHEET: https://datasheet.lcsc.com/lcsc/2110252030_UNI-ROYAL-Uniroyal-Elec-0603WAF1502T5E_C22809.pdf; LCSC_PART: C22809; LCSC_ROTATION_CCW: 0; LCSC_STOCK: 394790; PROPERTIES: ±1% 1/10W Thick Film Resistors 75V ±100ppm -55°C~+155°C 15kOhm 0603 ROHS
R131 = rcl; LCSC_PART: C4190; SPICEPREFIX: R
U1 = TCLT1600; AVAILABILITY: In Stock; DESCRIPTION: Optoisolator Transistor Output 5000Vrms 1 Channel 4-SOP (2.54mm); LCSC_PART: C553998; MF: Vishay Semiconductor; MP: TCLT1600; PACKAGE: LSOP-4 Vishay; PRICE: None; PURCHASE-URL: https://pricing.snapeda.com/search/part/TCLT1600/?ref=eda
U2 = ADXL343BCCZ-RL7; AVAILABILITY: In Stock; DESCRIPTION: 3-Axis, ±2 g/±4 g/±8 g/±16 g Digital Accelerometer; LCSC_PART: C9667; MF: Analog Devices; MP: ADXL343BCCZ-RL7; PACKAGE: LGA -14 Analog Devices; PRICE: None; PURCHASE-URL: https://pricing.snapeda.com/search/part/ADXL343BCCZ-RL7/?ref=eda
U3 = TMP102AIDRLR; AVAILABILITY: In Stock; DESCRIPTION: 2C digital temperature sensor, I2C/SMBus in 2.56mm2 package; LCSC_PART: C99269; MF: Texas Instruments; MP: TMP102AIDRLR; PACKAGE: SOT-5X3-6 Texas Instruments; PRICE: None; PURCHASE-URL: https://pricing.snapeda.com/search/part/TMP102AIDRLR/?ref=eda
U4 = SN74LVC1G17; AVAILABILITY: In Stock; DESCRIPTION: Buffer, Non-Inverting 1 Element 1 Bit per Element Push-Pull Output SOT-23-5; LCSC_PART: C10425; MF: Texas Instruments; MP: SN74LVC1G17; PACKAGE: SOT-23 Texas Instruments; PRICE: None; PURCHASE-URL: https://pricing.snapeda.com/search/part/SN74LVC1G17/?ref=eda
U5-U7 = SN74LVC1G17; AVAILABILITY: In Stock; DESCRIPTION: Buffer, Non-Inverting 1 Element 1 Bit per Element Push-Pull Output SOT-23-5; MF: Texas Instruments; MP: SN74LVC1G17; PACKAGE: SOT-23 Texas Instruments; PRICE: None; PURCHASE-URL: https://pricing.snapeda.com/search/part/SN74LVC1G17/?ref=eda
U$1 = ESP32-DEVKITV1
ULN1 = SparkFun-IC-Special-Function; LCSC_PART: C9683

## Nets
2: IC8.1 U$1.4
4: IC8.4 U$1.5
5: U$1.8 ULN1.6
12: JTAG.2 U$1.27
13 [3V3]: JTAG.3 U$1.28
14: JTAG.4 U$1.26
15: IC2.2 JTAG.5 U$1.3
16: IC1.1 U$1.6
17: IC1.4 U$1.7
18: D21.2 LED_ARRAY.2 U$1.9
19: D4.2 LED_ARRAY.3 U$1.10
21/SDA: I2C.4 NEBULA_A.13 R27.1 U2.13 U3.6 U$1.11
22/SCL: I2C.3 NEBULA_A.12 R26.1 U2.14 U3.1 U$1.14
23: U$1.15 ULN1.7
25_POOFER: Q1.1 R45.2 U$1.23
26_BOOM_IGNITER: Q4.1 R46.2 U$1.24
27_BOOM_FUEL: Q2.1 R47.2 U$1.25
32_BOOM_BLOWER: IC2.1 R48.2 U$1.21
33: U$1.22 ULN1.8
34: NEBULA_A.19 U$1.19
35: R49.2 U$1.20
36: U$1.17
39: U$1.18
120_LINE [120VAC_PWR]: 12VAC_IN.1 EPP-120S-24.IN- K1.NO K5.O1 K6.O1 R55.1 R56.1
120_NEUTRAL [120VAC_PWR]: 12VAC_IN.2 EPP-120S-24.IN+ FIRE_OUT.6 FIRE_OUT.8 FOG_IN.5 R55.2 R56.2
+3V3 [3V3]: C2.1 C3.1 C4.1 C8.1 C11.1 C12.1 C14.1 C28.+ C33.1 C36.1 D22.C D24.C D26.C D28.C D30.C D91.A I2C.1 IC1.8 IC2.14 IC3.14 IC4.14 IC8.8 IC22.4 NEBULA_A.9 NEBULA_A.18 R2.2 R26.2 R27.2 R50.1 U2.1 U2.6 U2.7 U2.12 U3.5 U4.5 U5.5 U6.5 U7.5 U$1.1
+5V [5V]: 5V_CTRL_LAZERS.2 5V_CTRL_LAZERS.4 5V_CTRL_LAZERS.6 5V_CTRL_LAZERS.8 C6.1 C32.1 C35.1 C89.+ D12.C D13.C D18.A D19.A D92.A IC22.3 K5.+ K6.+ LED_ARRAY.1 NID35-5.VOUT1 NID35-5.VOUT2 NID35-5.VOUT3 NID35-5.VOUT4 POWER_IN.2 R3.2 R4.2 U$1.30
+5V/2: D32.A K3.NO SKA15B-05.+VOUT
+12V [12V]: D15.C D16.A D93.A K1.2 K2.2 K3.1 NID35-12.VOUT1 NID35-12.VOUT2 NID35-12.VOUT3 NID35-12.VOUT4 POWER_IN.4 ULN1.10
+24V: C25.1 D14.C D17.A EPP-120S-24.OUT+ FIRE_OUT.3 NID35-5.VIN1 NID35-5.VIN2 NID35-12.VIN1 NID35-12.VIN2 SKA15B-05.+VIN X1.2
A0: C7.1 D1.A NEBULA_A.21 R8.1 U1.3
A1: NEBULA_A.22 ULN1.1
A2: NEBULA_A.23 ULN1.2
A3: NEBULA_A.24 ULN1.3
A4: IC8.3 NEBULA_A.25
A5: IC8.2 NEBULA_A.26
A6: IC1.3 NEBULA_A.27
A7: IC1.2 NEBULA_A.28
A8: NEBULA_A.1
A9: NEBULA_A.2
A10: NEBULA_A.3
A11: NEBULA_A.4
A12: NEBULA_A.5
A13: NEBULA_A.6
A14: NEBULA_A.7
A15: NEBULA_A.8
BOOMER_BLOWER: C22.1 D10.2 R38.1 STAR_INPUT.2
BOOMER_FUEL: C20.1 D5.2 R31.1 STAR_INPUT.3
BOOMER_IGNITER: C18.1 D11.2 R22.1 STAR_INPUT.4
EN_STATUS: D94.A IC4.6
EXP_ULN0: D2.C K1.1 ULN1.18
EXP_ULN1: D3.C K2.1 ULN1.17
EXP_ULN2: 5V_CTRL_LAZERS.7 ULN1.16
EXP_ULN3: ULN1.15
EXP_ULN4: ULN1.14
EXP_ULN5: 5V_CTRL_LAZERS.5 ULN1.13
EXP_ULN6: 5V_CTRL_LAZERS.3 ULN1.12
EXP_ULN7: 5V_CTRL_LAZERS.1 ULN1.11
GND [GND]: C1.2 C2.2 C3.2 C4.2 C6.2 C7.2 C8.2 C11.2 C12.2 C13.2 C14.2 C15.2 C16.2 C17.2 C18.2 C19.2 C20.2 C21.2 C22.2 C23.2 C25.2 C28.- C32.2 C33.2 C35.2 C36.2 C89.- D4.1 D5.1 D6.C D7.C D8.C D9.C D10.1 D11.1 D20.1 D21.1 D23.A D25.A D27.A D29.A D31.A D139.1 DMX_OUT.1 EPP-120S-24.OUT- I2C.2 IC1.5 IC2.7 IC3.7 IC4.7 IC8.5 IC22.1 JP1.1 JP1.2 JP1.3 JP1.4 JTAG.1 LED_ARRAY.4 NEBULA_A.10 NEBULA_A.15 NEBULA_A.16 NEBULA_A.17 NID35-5.COM1 NID35-5.COM2 NID35-12.COM1 NID35-12.COM2 OVERRIDE_EN2.3 OVERRIDE_EN.3 POWER_IN.1 POWER_IN.3 Q1.3 Q2.3 Q3.3 Q4.3 R6.1 R7.2 R8.2 R14.1 R23.1 R32.1 R39.1 R130.2 R131.2 R132.2 R139.2 SKA15B-05.-VIN STAR_INPUT.1 U2.2 U2.4 U2.5 U3.2 U3.4 U4.3 U5.3 U6.3 U7.3 U$1.2 U$1.29 ULN1.9 X1.1
GND3 [GND]: FIRE_OUT.2 R17.1 SKA15B-05.-VOUT
LOCAL_EN: IC4.4 R21.1 R30.1 R37.1 R44.1 R49.1
N$1: C1.1 U$1.16
N$2: R2.1 U1.4
N$3: D2.A R4.1
N$4: D3.A R3.1
N$5: DMX_OUT.2 IC8.7 R5.2
N$6: DMX_OUT.3 IC8.6 R5.1
N$7 [120VAC]: FOG_IN.3 R13.1
N$8 [120VAC]: R12.1 R13.2
N$9 [120VAC]: R11.1 R12.2
N$10 [120VAC]: R10.1 R11.2
N$11 [120VAC]: R10.2 U1.1
N$12: D1.C R7.1
N$13 [120VAC]: FOG_IN.2 K2.NO
N$14 [120VAC_PWR]: FOG_IN.4 K1.C
N$15 [120VAC]: FOG_IN.1 K2.C U1.2
N$16: IC3.1 R16.2 U4.4
N$17: C15.1 D22.A D23.C R9.2 R14.2 U4.2
N$18: D6.A R16.1
N$19: D32.C R17.2
N$21: IC4.2 R20.1
N$22: C17.1 IC4.3 IC4.5 OVERRIDE_EN2.2 OVERRIDE_EN.2 R20.2
N$23: C16.1 D30.A D31.C IC4.1 R6.2 R19.2
N$24: IC3.2 R21.2
N$25: C19.1 D28.A D29.C R22.2 R23.2 U7.2
N$26: IC3.4 R25.2 U7.4
N$27: D7.A R25.1
N$30: IC3.5 R30.2
N$31: C21.1 D24.A D25.C R31.2 R32.2 U5.2
N$32: IC3.9 R34.2 U5.4
N$33: D8.A R34.1
N$36: IC3.10 R37.2
N$37: C23.1 D26.A D27.C R38.2 R39.2 U6.2
N$38: IC3.12 R41.2 U6.4
N$39: D9.A R41.1
N$42: IC3.13 R44.2
N$43: IC3.3 R45.1
N$44: IC3.6 R46.1
N$45: IC3.8 R47.1
N$46: IC3.11 R48.1
N$47: D13.A K5.- Q2.4 R61.2
N$48: FIRE_OUT.7 K6.O2
N$49: D12.A K6.- Q1.4 R60.2
N$50: FIRE_OUT.5 K5.O2
N$51: D14.A FIRE_OUT.4 Q3.4 R62.2
N$52: D15.A K3.2 Q4.4 R15.2
N$53: FIRE_OUT.1 K3.C
N$54: D16.C R15.1
N$55: D17.C R62.1
N$56: D18.C R61.1
N$57: D19.C R60.1
N$58: OVERRIDE_EN2.1 OVERRIDE_EN.1 R50.2
N$60: IC2.3 Q3.1
N$108: IC1.7 R1.2 STAR_INPUT.7
N$109: IC1.6 R1.1 STAR_INPUT.8
N$156: D91.C R130.1
N$157: D92.C R131.1
N$158: D93.C R132.1
N$159: D94.C R139.1
POOFER: C13.1 D139.2 R9.1 STAR_INPUT.5
STAR_ENABLE: D20.2 R19.1 STAR_INPUT.6